# Altium PCB DC CV - PCB.PcbDoc
Units mil, origin at the board's own origin, x right, y up, seen from the top; angles counter-clockwise.
Board outline 1574.8 x 4409.45 mil, 4 copper layers (Top Layer, Signal Layer 1, Signal Layer 2, Bottom Layer), stack 61.811 mil thick; 42 components, 18 nets, 117 pads, 298 vias.
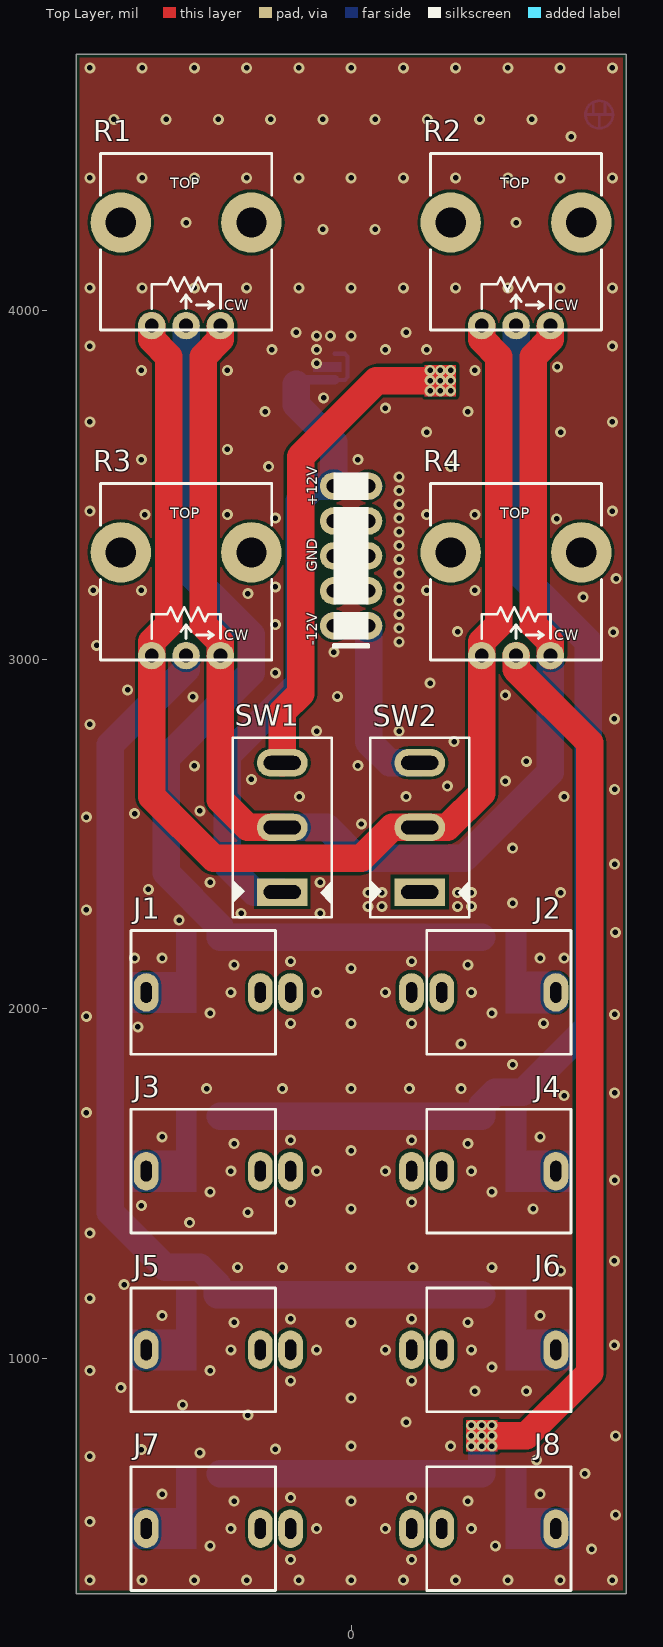
[diagram p0: Top Layer view]
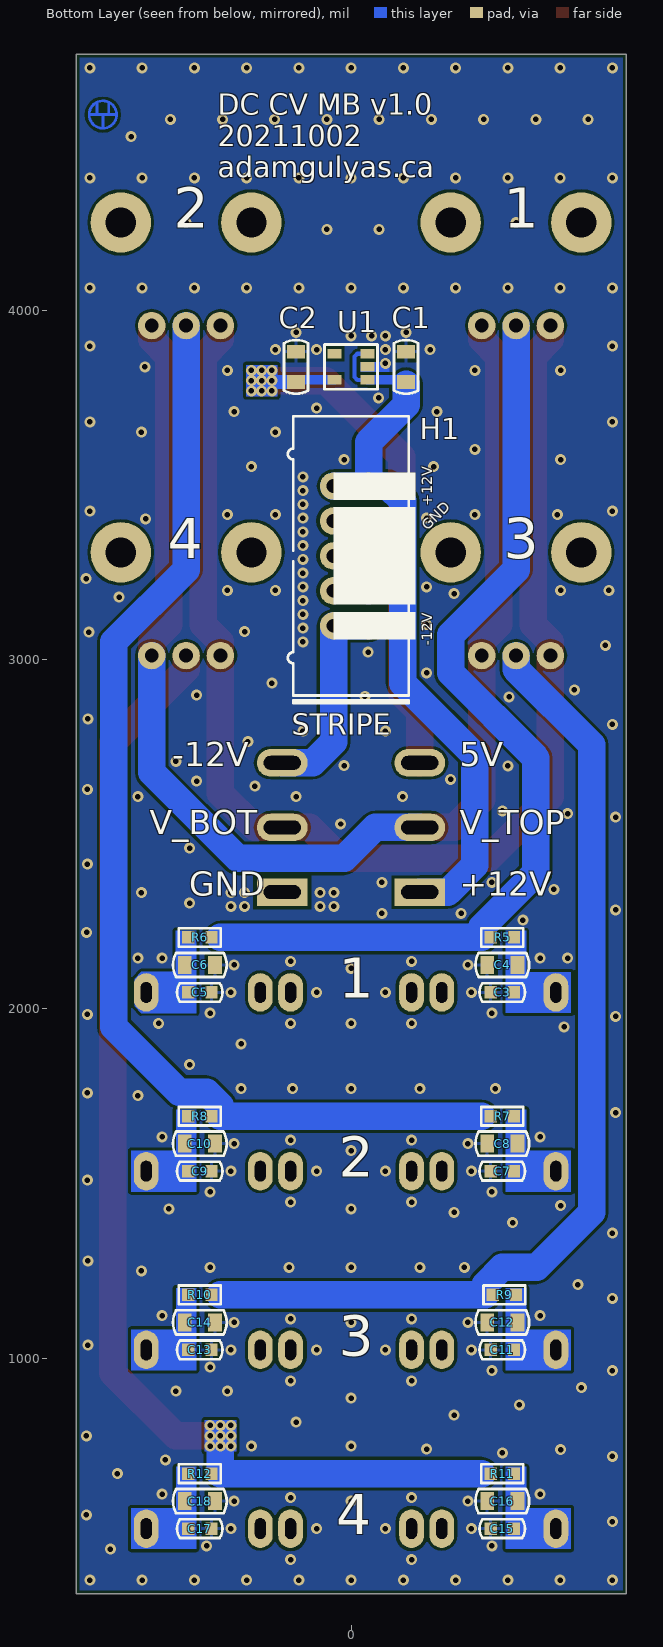
[diagram p1: Bottom Layer view, seen from below]
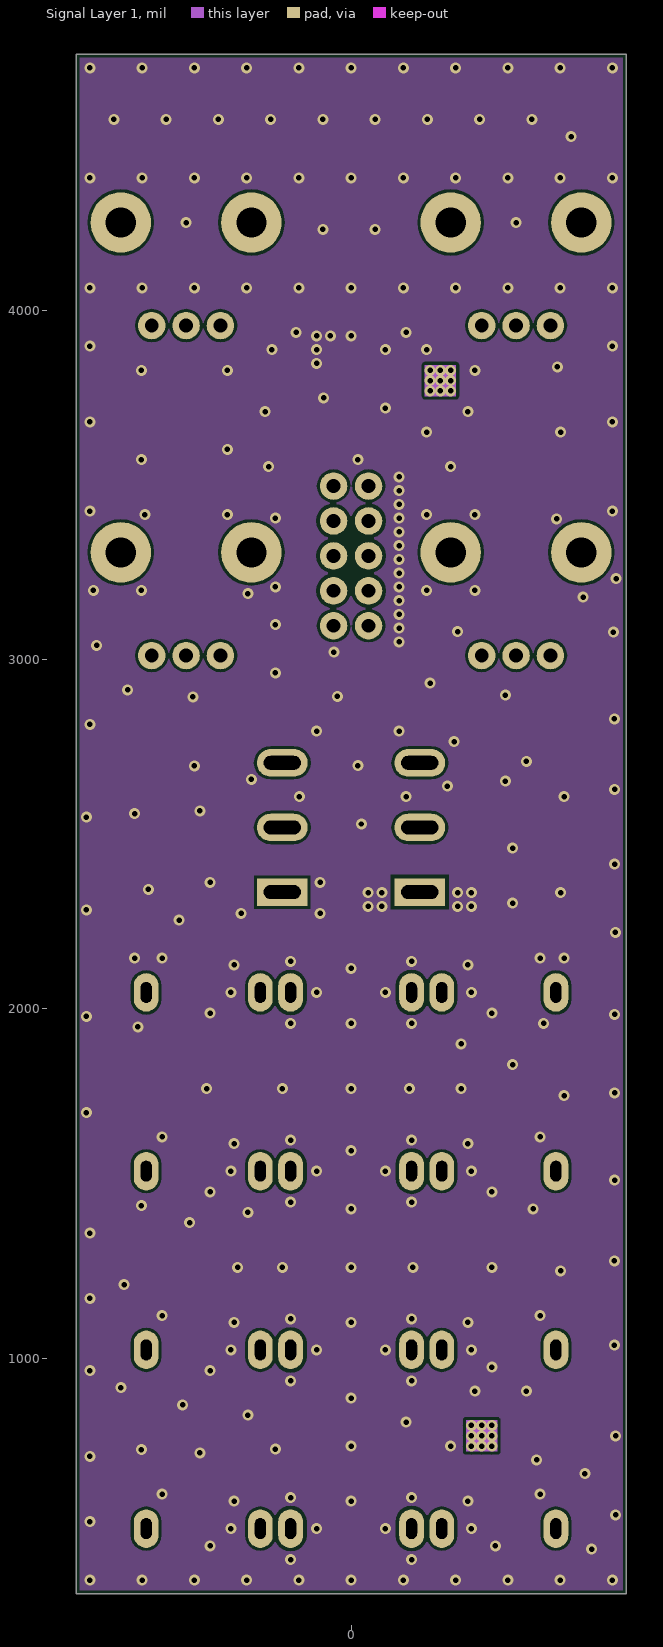
[diagram p2: Signal Layer 1]
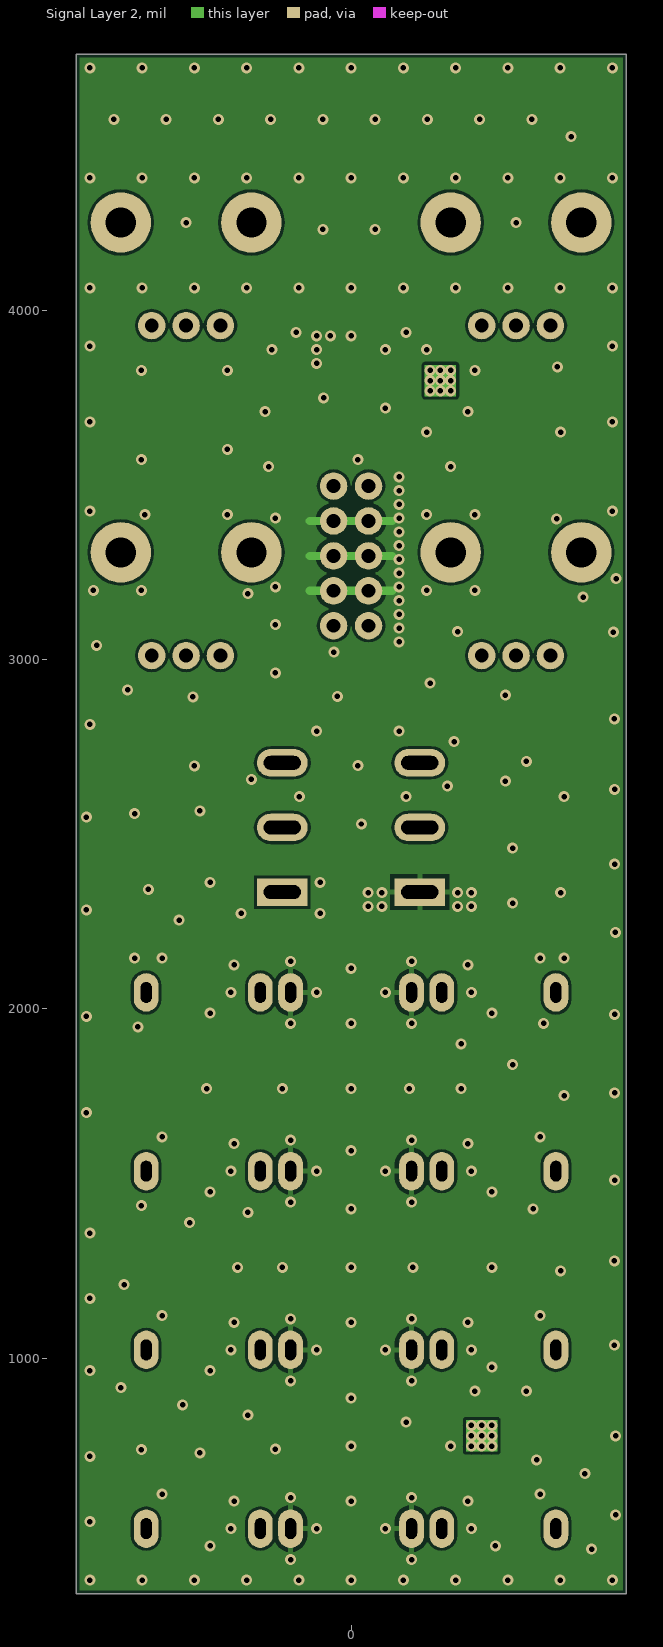
[diagram p3: Signal Layer 2]
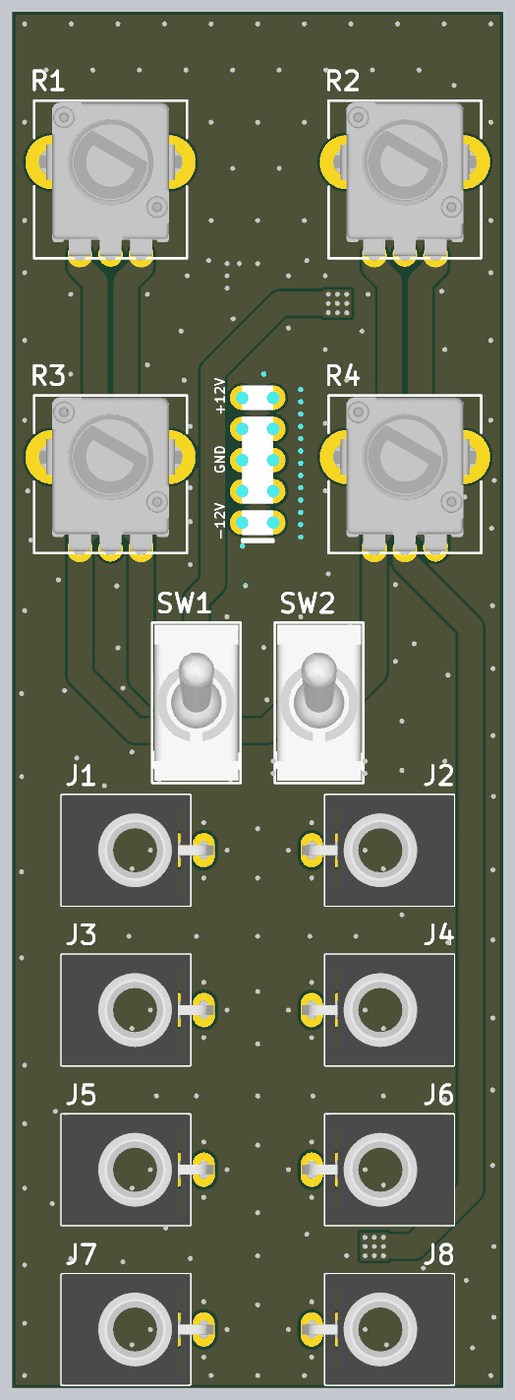
[diagram p4: 3D render of the assembled board from above, using the file's embedded part models]
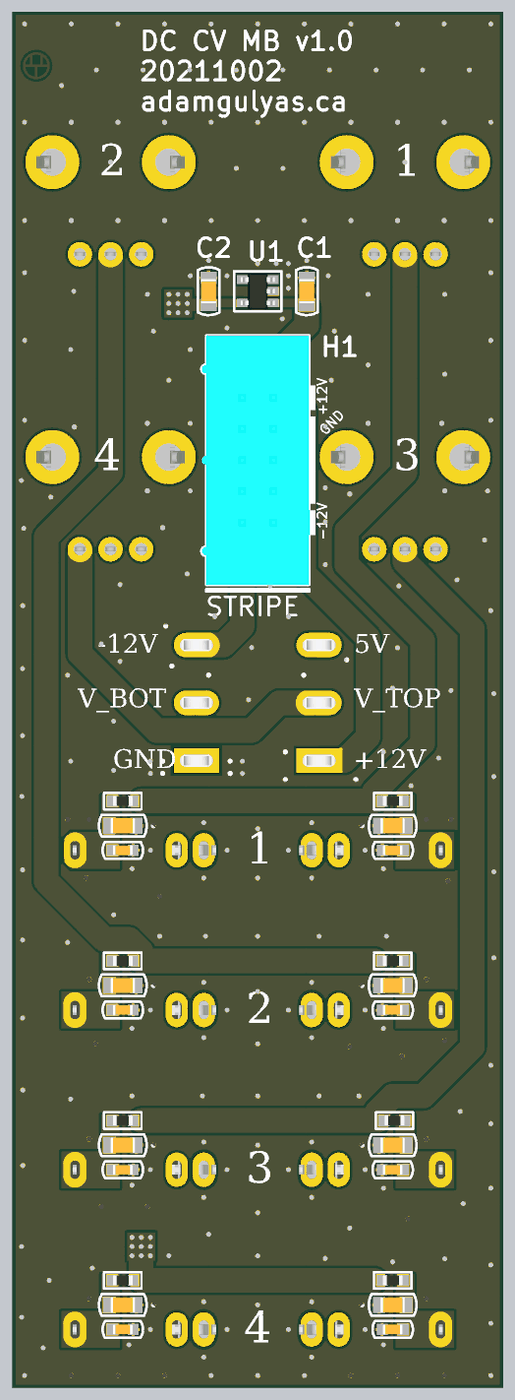
[diagram p5: 3D render of the assembled board from below, using the file's embedded part models]

## Layer stack, top to bottom
Top Solder: solder mask 0.3937, Solder Resist, Dk 3.5
Top Layer: signal copper 1.378
Dielectric 1: prepreg 7.874, FR-4, Dk 4.6
Signal Layer 1: signal copper 0.689
Dielectric 3: core 41.9291, FR-4, Dk 4.6
Signal Layer 2: signal copper 0.689
Dielectric 2: prepreg 7.874, FR-4, Dk 4.6
Bottom Layer: signal copper 1.378
Bottom Solder: solder mask 0.3937, Solder Resist, Dk 3.5

## Board outline
-787.4,324.8 -787.4,4734.25 787.4,4734.25 787.4,324.8

## Design rules (kind name [scope] priority, off if disabled: settings)
Clearance [All] p1: gap=7.87 ignorepadtopadclearanceinfootprint=FALSE
Height [All] p1: minheight=0 maxheight=39370.08 prefheight=500
HoleSize [All] p1: absolutevalues=TRUE maxlimit=3937.01 minlimit=1 maxpercent=80.000 minpercent=20.000
PolygonConnect PolygonConnect_GND_Thermals [OnLayer('Signal Layer 2') vs InNet('GND')] p1: thpad.connectstyle=Relief thpad.reliefconductorwidth=15.75 thpad.reliefentries=4 thpad.polygonreliefangle="90 Angle" thpad.airgapwidth=11.81 smdpad.connectstyle=Relief smdpad.reliefconductorwidth=10 smdpad.reliefentries=4 smdpad.polygonreliefangle="90 Angle" smdpad.airgapwidth=10 via.connectstyle=Direct via.reliefconductorwidth=10 via.reliefentries=4 via.polygonreliefangle="90 Angle" via.airgapwidth=10
PolygonConnect [All] p2: thpad.connectstyle=NoConnect thpad.reliefconductorwidth=10 thpad.reliefentries=4 thpad.polygonreliefangle="90 Angle" thpad.airgapwidth=10 smdpad.connectstyle=Relief smdpad.reliefconductorwidth=10 smdpad.reliefentries=4 smdpad.polygonreliefangle="90 Angle" smdpad.airgapwidth=10 via.connectstyle=Direct via.reliefconductorwidth=10 via.reliefentries=4 via.polygonreliefangle="90 Angle" via.airgapwidth=10
RoutingVias [All] p1: holewidth=15.75 width=31.5 viastyle="Through Hole" minholewidth=3.94 minwidth=0 maxholewidth=3937.01 maxwidth=3937.01
SolderMaskExpansion [All] p1: expansion=4
Width [All] p1: maxlimit=3937.01 minlimit=10 preferedwidth=10 minimp=50.000000 maximp=50.000000 favimp=50.000000
28 further rules are at their usual default settings.

## Components (designator, comment, footprint, x,y, rotation, side; value= is the part's Value field where it differs from the comment)
C1 "10µF" "0805 - C" -157.48,3838.58 r90 bottom
C2 "10µF" "0805 - C" 157.48,3838.58 r90 bottom
C3 "100nF" "0603 - C" -433.07,2047.24 r0 bottom value=0.1µF
C4 "10µF" "0805 - C" -433.07,2125.98 r0 bottom
C5 "100nF" "0603 - C" 433.07,2047.24 r180 bottom value=0.1µF
C6 "10µF" "0805 - C" 433.07,2125.98 r180 bottom
C7 "100nF" "0603 - C" -433.07,1535.43 r0 bottom value=0.1µF
C8 "10µF" "0805 - C" -433.07,1614.17 r0 bottom
C9 "100nF" "0603 - C" 433.07,1535.43 r180 bottom value=0.1µF
C10 "10µF" "0805 - C" 433.07,1614.17 r180 bottom
C11 "100nF" "0603 - C" -433.07,1023.62 r0 bottom value=0.1µF
C12 "10µF" "0805 - C" -433.07,1102.36 r0 bottom
C13 "100nF" "0603 - C" 433.07,1023.62 r180 bottom value=0.1µF
C14 "10µF" "0805 - C" 433.07,1102.36 r180 bottom
C15 "100nF" "0603 - C" -433.07,511.81 r0 bottom value=0.1µF
C16 "10µF" "0805 - C" -433.07,590.55 r0 bottom
C17 "100nF" "0603 - C" 433.07,511.81 r180 bottom value=0.1µF
C18 "10µF" "0805 - C" 433.07,590.55 r180 bottom
H1 "Synth Power Header" "EURORACK POWER - 10 PIN - DC CV" 0,3297.24 r180 bottom
J1 "PJ-3001F" "Jack - TS - PJ-3001F" -393.7,2047.24 r90 top
J2 "PJ-3001F" "Jack - TS - PJ-3001F" 393.7,2047.24 r270 top
J3 "PJ-3001F" "Jack - TS - PJ-3001F" -393.7,1535.43 r90 top
J4 "PJ-3001F" "Jack - TS - PJ-3001F" 393.7,1535.43 r270 top
J5 "PJ-3001F" "Jack - TS - PJ-3001F" -393.7,1023.62 r90 top
J6 "PJ-3001F" "Jack - TS - PJ-3001F" 393.7,1023.62 r270 top
J7 "PJ-3001F" "Jack - TS - PJ-3001F" -393.7,511.81 r90 top
J8 "PJ-3001F" "Jack - TS - PJ-3001F" 393.7,511.81 r270 top
R1 "100kΩ" "Pot - P0915N" -472.44,4251.97 r0 top locked
R2 "100kΩ" "Pot - P0915N" 472.44,4251.97 r0 top locked
R3 "100kΩ" "Pot - P0915N" -472.44,3307.09 r0 top locked
R4 "100kΩ" "Pot - P0915N" 472.44,3307.09 r0 top locked
R5 "470Ω" "0603 - R" -433.07,2204.72 r180 bottom value="470 Ohms"
R6 "470Ω" "0603 - R" 433.07,2204.72 r0 bottom value="470 Ohms"
R7 "470Ω" "0603 - R" -433.07,1692.91 r180 bottom value="470 Ohms"
R8 "470Ω" "0603 - R" 433.07,1692.91 r0 bottom value="470 Ohms"
R9 "470Ω" "0603 - R" -438.98,1181.1 r180 bottom value="470 Ohms"
R10 "470Ω" "0603 - R" 433.07,1181.1 r0 bottom value="470 Ohms"
R11 "470Ω" "0603 - R" -433.07,669.29 r180 bottom value="470 Ohms"
R12 "470Ω" "0603 - R" 433.07,669.29 r0 bottom value="470 Ohms"
SW1 "100SP1T1B1M1QEH" "SW - 100SP1T1B1M1QEH" -196.85,2519.68 r180 top
SW2 "100SP1T1B1M1QEH" "SW - 100SP1T1B1M1QEH" 196.85,2519.68 r180 top
U1 "NCV8711ASN500T1G" "TSOT 23 5" 0,3838.58 r0 bottom

## Footprints (in the part's own frame and the unit in brackets; to place one, negate y for a bottom-side part, rotate by r counter-clockwise, add the part's x,y. Pads: shape width x height; smd on the part's side, far side on the other; paste and mask are expansions set on the pad)
"0603 - C" [mm] "from Yageo R"
  rect 0.9x0.9 smd mask+0.05: 1(-0.85,0) 2(0.85,0)
  silkscreen extent -1.65,-0.67 1.65,0.67, body extent -0.8,-0.4 0.8,0.4, height 0.9
"0603 - R" [mm] "from Yageo"
  rect 0.9x0.9 smd mask+0.05: 1(-0.85,0) 2(0.85,0)
  silkscreen extent -1.53,-0.67 1.53,0.67, body extent -0.8,-0.4 0.8,0.4, height 0.4
"0805 - C" [mm]
  rect 1x1.3 smd mask+0.04: 1(-1.1,0) 2(1.1,0)
  silkscreen extent -1.95,-0.87 1.95,0.87, body extent -1,-0.63 1,0.62, height 0.85
"EURORACK POWER - 10 PIN - DC CV" [mm] "from 30310-6002HB-ND"
  round 2 hole 1 mask+0.05: 1(-1.27,5.08) 1(1.27,5.08) 2(-1.27,-2.54) 2(-1.27,0) 2(-1.27,2.54) 2(1.27,-2.54) 2(1.27,0) 2(1.27,2.54) 3(-1.27,-5.08) 3(1.27,-5.08)
  silkscreen extent -4.6,-10.7 4.69,10.15, body extent -4.56,-10.15 4.25,10.15, height 8.89
"Jack - TS - PJ-3001F" [mm]
  oval 2.8x1.8 hole 0.8 slot 1.5 at 0 deg mask+0.05: 1(0,-5.6) 2(0,-3.4) 3(0,4.9)
  silkscreen extent -4.5,-4.5 4.5,6, body extent -4.5,-6.63 4.5,6, height 14.5
"Pot - P0915N" [mm] "from P0915N-FC15BR100K"
  round 4.4 hole 2.2 mask+0.05: 0(-4.75,0) 0(4.75,0)
  round 2 hole 1 mask+0.05: 1(-2.5,-7.5) 2(0,-7.5) 3(2.5,-7.5)
  silkscreen extent -6.22,-7.83 6.22,5.02, body extent -6.05,-7.65 6.05,4.85, height 25.05
"SW - 100SP1T1B1M1QEH" [mm]
  rect 3.7x2 hole 1 slot 2.7 at 0 deg mask+0.05: 1(0,4.7)
  rrect100% 3.7x2 hole 1 slot 2.7 at 0 deg mask+0.05: 2(0,0) 3(0,-4.7)
  silkscreen extent -3.6,-6.53 3.6,6.53, body extent -3.43,-6.35 3.43,6.35, height 28.96
"TSOT 23 5" [mm]
  rect 1x0.7 smd mask+0.05: 1(-1.2,0.95) 2(-1.2,0) 3(-1.2,-0.95) 4(1.2,-0.95) 5(1.2,0.95)
  silkscreen extent -1.92,-1.63 1.92,1.63, body extent -1.4,-1.45 1.4,1.45, height 0.95

## Part data
C1 C2 C4 C6 C8 C10 C12 C14 C16 C18: library part "C - 0805 - 10uF - 16V", "CAP CER 10UF 16V X5R 0805", Op Temp="-55°C ~ 85°C", Package=0805, Temp Coeff=X5R, Tolerance=±20%, Voltage - Rated=16V, Composition=ceramic, Digi-Key PN=311-3430-1-ND, Height=1.45mm, MFG=Yageo, MFG PN=CC0805MKX5R7BB106, Mounting Type="Surface Mount, MLCC", Price/1 @10=$0.352, Series=CC
C3 C5 C7 C9 C11 C13 C15 C17: library part "C - 0603 - 100nF - 16V", "CAP CER 0.1UF 16V X7R 0603", Op Temp="-55°C ~ 125°C", Package=0603, Temp Coeff=X7R, Tolerance=±10%, Voltage - Rated=16V, Composition=Ceramic, Digi-Key PN=311-1088-1-ND, Height="0.9 mm", MFG=Yageo, MFG PN=CC0603KRX7R7BB104, Mounting Type="Surface Mount, MLCC", Price/1 @10=$0.064, Series=CC
H1: library part "H - Synth Power", "CONN HEADER VERT 10POS 2.54MM", Current Rating (Amps)=1A, Material Flammability Rating="UL94 V-0", Op Temp="-55°C ~ 105°C", Contact Length - Mating=6.00mm, Contact Length - Post=2.79mm, Contact Type="Male Pin", Digi-Key PN=30310-6002HB-ND, Fastening Type=Push-Pull, Features="Keying Slot", Insulation Height=9.30mm, Insulation Material="Polybutylene Terephthalate (PBT), Polyester, Glass Filled", MFG=3M, MFG PN=30310-6002HB, Mounting Type="Through Hole", Number of Positions=10, Number of Rows=2, Pitch - Mating="0.100\"", Price/1 @10=$0.815, Row Spacing - Mating="0.100\"", Series=303, Shrouding="Shrouded - 4 Wall", Termination=Solder
J1 J2 J3 J4 J5 J6 J7 J8: library part "Jack - TS - PJ-3001F", "3.5MM MONO PHONE JACK WITH SWITCH", Rated Current=1A, Rated Voltage=12VDC, ComponentLink1Description=Datasheet, ComponentLink1URL="E:\!Projects\!31. Hackathon Synth\basic-synth\modules\VCA\v1.1.0\Datasheets\PJ-3001F - TS Jack.jpeg", ComponentLink2Description="Online Datasheet", ComponentLink2URL=https://www.taydaelectronics.com/datasheets/files/A-2563.jpeg, ComponentLink3Description="Store Page", ComponentLink3URL=https://www.taydaelectronics.com/pj-3001f-3-5-mm-mono-phone-jack.html, Digi-Key PN=-, MFG="Tayda Electronics", MFG PN=PJ-3001F, Mounting Type="Panel Mounting", Price/1 @10=$0.23, Vendor PN=A-2563
R1 R2 R3 R4: library part "R - pot - 100k", "POT 100K OHM 1/20W PLASTIC LIN", Power (Watts)=50mW, Resistance=100k, Resistive Material="Conductive Plastic", Tolerance=±20%, Actuator Type=Flatted, Adjustment Type="Top Adjustment", Bushing Thread="M7 x 0.75", ComponentLink1Description=Datasheet, ComponentLink1URL="E:\!Projects\!31. Hackathon Synth\basic-synth\modules\VCA\v1.1.0\Datasheets\TT Electronics - P09x Series.pdf", ComponentLink2Description="Online Datasheet", ComponentLink2URL=https://www.mouser.ca/datasheet/2/414/P09x-1545427.pdf, Digi-Key PN=987-1709-ND, MFG="TT Electronics", MFG PN=P0915N-FC15BR100K, Mounting Type="Panel Mount", Number of Gangs=1, Number of Turns=1, Price/1 @10=$1.66, Rotation=300°, Series=P09x, Size - Body="Rectangular - 11.35mm x 9.50mm Face x 7.45mm H", Taper=Linear, Termination Style="PC Pins, Board Locks"
  R1: Purpose=CV1
  R2: Purpose=CV3
  R3 R4: Purpose=CV2
R5 R6 R7 R8 R9 R10 R11 R12: library part "R - 0603 - 470R", "RES SMD 470 OHM 5% 1/10W 0603", Op Temp="-55°C ~ 155°C", Package=0603, Power=0.1W, Temp Coeff=±100ppm/°C, Tolerance=5%, ComponentLink1Description=Datasheet, ComponentLink1URL="E:\!Projects\50. XInC2 Dev 2\git\Datasheets\Yageo - RC series.pdf", ComponentLink2Description="Online Datasheet", ComponentLink2URL=https://www.yageo.com/upload/media/product/productsearch/datasheet/rchip/PYu-RC_Group_51_RoHS_L_11.pdf, Composition="Thick Film", Digi-Key PN=311-470GRCT-ND, Height=0.55mm, MFG=Yageo, MFG PN=RC0603JR-07470RL, Mounting Type="Surface Mount", Price/1 @10=$0.02500, Series=RC
SW1 SW2: library part "SW - SPDT - toggle - 100SP1T1B1M1QEH", "SWITCH TOGGLE SPDT 5A 120V", Current Rating (Amps)="5A (AC/DC)", Op Temp="-30°C ~ 85°C", Voltage Rating - DC="28 V", Bushing Thread=1/4-40, Circuit=SPDT, Digi-Key PN=EG2350-ND, MFG=E-Switch, MFG PN=100SP1T1B1M1QEH, Mounting Type="Panel Mount", Price/1 @10=$3.163, Series=100, Switch Function=On-On, Termination Style="Solder Lug"
U1: library part "Reg - Lin - 5V - NCV8711ASN500T1G", "IC REG LINEAR 5V 100MA 5TSOP", Current - Output=100mA, Current - Quiescent (Iq)="2.5 µA", Op Temp="-40°C ~ 125°C (TJ)", Package="SOT-23-5 Thin, TSOT-23-5", Voltage - Dropout="0.355V @ 100mA", Voltage - Input (Max)=18V, Voltage - Output (Max)=-, Voltage - Output (Min/Fixed)=5V, Digi-Key PN=488-NCV8711ASN500T1GCT-ND, MFG=onsemi, MFG PN=NCV8711ASN500T1G, Mounting Type="Surface Mount", Number of Outputs=1, Output Configuration=Positive, Output Type=Fixed, Price/1 @10=$0.915, Protection Features="Over Current, Over Temperature", Series="Automotive, AEC-Q100"

## Via types
v1: diameter 31.5, hole 15.75, Top Layer to Bottom Layer, tented both sides, 298 vias

## Nets (pads, with @x,y where several pads share a name; then routed paths per layer and width w, separated by ;. In a path a pad name is that pad's centre, name@x,y a point inside that pad or via, vN(x,y) a via of type N, cw(c..) or ccw(c..) an arc to the next point about the centre after c; other vN are vias at no path point)
5V: C2.1 SW1.3 U1.5 | length 1602.3
  Top Layer w78.74: SW1.3 -196.85,2850.39 -144.68,2902.56 -144.68,3581.69 72.83,3799.21 v1(226.38,3799.21)
  Bottom Layer w27.56: U1.5 151.57,3801.18 C2.1 ; v1@226.1,3799.49 226.38,3799.49 255.63,3799.22 v1(255.91,3799.21) v1@251.97,3795.28
  Bottom Layer w39.37: C2.1 v1@251.97,3795.28
  other v1: 226.38,3769.68 255.91,3769.68 285.43,3769.68 285.43,3799.21 226.38,3828.74 255.91,3828.74 285.43,3828.74
+12V: C1.1 H1.1 SW1.1 U1.1 U1.3 | length 2114.8
  Bottom Layer w11.81: U1.1 -17.72,3801.18 -9.84,3809.06 -9.84,3868.11 -17.72,3875.98 U1.3
  Bottom Layer w27.56: C1.1@-151.57,3801.18 U1.1
  Bottom Layer w78.74: SW1.1 -277.56,2334.65 -354.33,2411.42 -354.33,2726.38 -147.64,2933.07 -147.64,3454.72 -105.12,3497.24 H1.1@-50,3497.24 ; C1.1@-157.48,3789.37 -157.48,3730.31 -50,3622.83 H1.1@-50,3497.24 ; H1.1@50,3497.24 H1.1@-50,3497.24
-12V: H1.3 SW2.3 | length 604.1
  Bottom Layer w78.74: H1.3@-50,3097.24 50,3097.24 50,2764.96 110.24,2704.72 SW2.3
CV1: R1.2 R5.1 R6.1 | length 2743
  Bottom Layer w78.74: R1.2 -472.44,3257.87 -285.43,3070.87 -285.43,2962.6 -529.53,2718.5 -529.53,2389.76 -374.02,2234.25 -374.02,2204.72 374.02,2204.72
CV2: R2.2 R7.1 R8.1 | length 3269.9
  Bottom Layer w78.74: -374.02,1692.91 374.02,1692.91 374.02,1722.44 413.39,1761.81 492.13,1761.81 679.13,1948.82 679.13,3051.18 472.44,3257.87 R2.2
CV3: R3.2 R9.1 R10.1 | length 2862.3
  Bottom Layer w78.74: R3.2 -472.44,2972.44 -688.98,2755.91 -688.98,1417.32 -531.5,1259.84 -433.07,1259.84 -383.86,1210.63 -383.86,1181.1 374.02,1181.1
CV4: R4.2 R11.1 R12.1 | length 3380.8
  Top Layer w78.74: v1(374.02,777.56) v1(403.54,777.56) 501.97,777.56 683.07,958.66 683.07,2761.81 472.44,2972.44 R4.2
  Bottom Layer w78.74: -374.02,669.29 374.02,669.29 v1(374.02,748.03) v1(374.02,777.56)
  other v1: 344.49,748.03 403.54,748.03 344.49,777.56 344.49,807.09 374.02,807.09 403.54,807.09
GND: C1.2 C2.2 C3.2 C4.2 C5.2 C6.2 C7.2 C8.2 C9.2 C10.2 C11.2 C12.2 C13.2 C14.2 C15.2 C16.2 C17.2 C18.2 H1.2 J1.1 J2.1 J3.1 J4.1 J5.1 J6.1 J7.1 J8.1 SW2.1 U1.2 | length 708.7
  Signal Layer 2 w23.62: -118.11,3197.24 -50,3197.24 50,3197.24 118.11,3197.24 ; -118.11,3297.24 -50,3297.24 50,3297.24 118.11,3297.24 ; -118.11,3397.24 -50,3397.24 50,3397.24 118.11,3397.24
  other v1: -748.03,364.17 -598.43,364.17 -448.82,364.17 -299.21,364.17 -149.61,364.17 0,364.17 149.61,364.17 299.21,364.17 448.82,364.17 598.43,364.17 748.03,364.17 -173.23,423.23 173.23,423.23 688.98,452.76 -403.54,462.6 413.39,462.6 -344.49,511.81 -98.43,511.81 98.43,511.81 344.49,511.81 -748.03,531.5 757.87,551.18 -334.65,590.55 0,590.55 334.65,590.55 -173.23,600.39 173.23,600.39 -541.34,610.24 541.34,610.24 669.29,669.29 531.5,708.66 -748.03,718.5 -433.07,728.35 -600.39,738.19 -216.54,739.17 0,748.03 285.43,748.03 757.87,777.56 157.48,816.93 -295.28,836.61 -482.28,866.14 0,885.83 354.33,905.51 501.97,905.51 -659.45,915.35 -173.23,935.04 173.23,935.04 -748.03,964.57 -403.54,964.57 403.54,974.41 -344.49,1023.62 -98.43,1023.62 98.43,1023.62 344.49,1023.62 753.94,1037.4 -334.65,1102.36 0,1102.36 334.65,1102.36 -173.23,1112.2 173.23,1112.2 -541.34,1122.05 541.34,1122.05 -748.03,1171.26 -649.61,1210.63 600.39,1250 -324.8,1259.84 -196.85,1259.84 0,1259.84 177.17,1259.84 403.54,1259.84 753.94,1278.54 -748.03,1358.27 -462.6,1387.8 -295.28,1417.32 0,1427.17 521.65,1427.17 -600.39,1437.01 -173.23,1446.85 173.23,1446.85 -403.54,1476.38 403.54,1476.38 754.92,1509.84 -344.49,1535.43 -98.43,1535.43 98.43,1535.43 344.49,1535.43 0,1594.49 -334.65,1614.17 334.65,1614.17 -173.23,1624.02 173.23,1624.02 -541.34,1633.86 541.34,1633.86 -757.87,1702.76 610.24,1751.97 754.92,1759.84 -413.39,1771.65 -196.85,1771.65 0,1771.65 167.32,1771.65 314.96,1771.65 462.6,1840.55 314.96,1899.61 -610.24,1948.82 -173.23,1958.66 0,1958.66 173.23,1958.66 551.18,1958.66 -757.87,1978.35 754.92,1984.25 -403.54,1988.19 403.54,1988.19 -344.49,2047.24 -98.43,2047.24 98.43,2047.24 344.49,2047.24 0,2116.14 -334.65,2125.98 334.65,2125.98 -173.23,2135.83 173.23,2135.83 -620.08,2145.67 -541.34,2145.67 541.34,2145.67 610.24,2145.67 756.89,2219.49 -492.13,2253.94 -314.96,2273.62 -88.58,2273.62 -757.87,2283.46 49.21,2293.31 88.58,2293.31 305.12,2293.31 344.49,2293.31 462.6,2303.15 49.21,2332.68 88.58,2332.68 305.12,2332.68 344.49,2332.68 600.39,2332.68 -580.71,2342.52 -403.54,2362.2 -88.58,2362.2 754.92,2414.37 462.6,2460.63 29.53,2529.53 -757.87,2549.21 -620.08,2559.06 -433.07,2566.93 -147.64,2608.27 157.48,2608.27 610.24,2608.27 754.92,2628.94 275.59,2637.8 441.93,2652.56 -285.43,2657.48 -448.82,2695.87 19.68,2696.85 501.97,2708.66 295.28,2765.75 -98.43,2795.28 137.8,2795.28 -748.03,2814.96 753.94,2830.71 -452.76,2893.7 -39.37,2894.83 441.93,2898.62 -639.76,2913.39 226.38,2933.07 -216.54,2962.6 -49.21,3021.65 -728.35,3041.34 137.8,3051.18 750.98,3078.74 305.12,3080.71 137.8,3090.55 -216.54,3100.39 137.8,3129.92 137.8,3169.29 664.37,3179.13 -295.28,3188.98 -738.19,3198.82 -600.39,3198.82 216.54,3198.82 354.33,3198.82 -216.54,3208.66 137.8,3208.66 758.86,3232.28 137.8,3248.03 137.8,3287.4 137.8,3326.77 137.8,3366.14 588.58,3403.54 -216.54,3405.51 137.8,3405.51 -590.55,3415.35 -354.33,3415.35 216.54,3415.35 354.33,3415.35 -748.03,3425.2 748.03,3425.2 137.8,3444.88 137.8,3484.25 137.8,3523.62 -236.22,3553.15 285.43,3553.15 -600.39,3572.83 19.68,3572.83 -354.33,3602.36 216.54,3651.57 600.39,3651.57 -748.03,3681.1 748.03,3681.1 -246.06,3710.63 334.65,3710.63 98.43,3720.47 -78.74,3750 -600.39,3828.74 -354.33,3828.74 354.33,3828.74 590.55,3838.58 -98.43,3848.43 -226.38,3887.8 -98.43,3887.8 98.43,3887.8 216.54,3887.8 -748.03,3897.64 748.03,3897.64 -98.43,3927.17 -59.06,3927.17 0,3927.17 -157.48,3937.01 157.48,3937.01 -748.03,4064.96 -598.43,4064.96 -448.82,4064.96 -299.21,4064.96 -149.61,4064.96 0,4064.96 149.61,4064.96 299.21,4064.96 448.82,4064.96 598.43,4064.96 748.03,4064.96 -80.71,4232.28 68.9,4232.28 -472.44,4251.97 472.44,4251.97 -748.03,4379.92 -598.43,4379.92 -448.82,4379.92 -299.21,4379.92 -149.61,4379.92 0,4379.92 149.61,4379.92 299.21,4379.92 448.82,4379.92 598.43,4379.92 748.03,4379.92 629.92,4498.03 -679.13,4547.24 -529.53,4547.24 -379.92,4547.24 -230.32,4547.24 -80.71,4547.24 68.9,4547.24 218.5,4547.24 368.11,4547.24 517.72,4547.24 -748.03,4694.88 -598.43,4694.88 -448.82,4694.88 -299.21,4694.88 -149.61,4694.88 0,4694.88 149.61,4694.88 299.21,4694.88 448.82,4694.88 598.43,4694.88 748.03,4694.88
NetC3_1: C3.1 C4.1 J1.3 R5.2
NetC5_1: C5.1 C6.1 J2.3 R6.2
NetC7_1: C7.1 C8.1 J3.3 R7.2
NetC9_1: C9.1 C10.1 J4.3 R8.2
NetC11_1: C11.1 C12.1 J5.3 R9.2
NetC13_1: C13.1 C14.1 J6.3 R10.2
NetC15_1: C15.1 C16.1 J7.3 R11.2
NetC17_1: C17.1 C18.1 J8.3 R12.2
V_BOTTOM: R1.1 R2.1 R3.1 R4.1 SW2.2 | length 3864.3
  Top Layer w78.74: R1.1 -570.87,3917.32 -521.65,3868.11 -521.65,3100.39 -570.87,3051.18 R3.1 -570.87,2608.27 -393.7,2431.1 29.53,2431.1 118.11,2519.68 SW2.2 275.59,2519.68 374.02,2618.11 R4.1 374.02,3051.18 423.23,3100.39 423.23,3868.11 374.02,3917.32 R2.1
V_TOP: R1.3 R2.3 R3.3 R4.3 SW1.2 | length 3835.4
  Top Layer w78.74: R1.3 -374.02,3917.32 -423.23,3868.11 -423.23,3100.39 -374.02,3051.18 R3.3 -374.02,2598.43 -295.28,2519.68 SW1.2 ; R4.3 570.87,3051.18 521.65,3100.39 521.65,3868.11 570.87,3917.32 R2.3
  Bottom Layer w78.74: SW1.2 -68.9,2519.68 19.68,2431.1 324.8,2431.1 570.87,2677.17 R4.3
pads on no net: J1.2 J2.2 J3.2 J4.2 J5.2 J6.2 J7.2 J8.2 R1.0 R2.0 R3.0 R4.0 U1.4
copper on no net: | length 862.8
  Bottom Layer w7.87: 693.9,4560.97 693.9,4594.43 693.9,4561.95 ; 727.36,4560.97 727.36,4594.43 727.36,4561.95 ; 750,4560.97 ccw(c710.63,4560.97) 750,4560.97 ; 750,4560.97 ccw(c710.63,4560.97) 750,4560.97 ; 750,4560.97 671.26,4560.97 750,4560.97 ; 710.63,4521.6 710.63,4560.97 710.63,4521.6

## Polygon pours and split planes (outlines as drawn)
GND on Signal Layer 1 "GND_L02_P004" (solid, pour order 4): -777.56,4724.41 777.56,4724.41 777.56,334.65 -777.56,334.65
GND on Signal Layer 2 "GND_L03_P006" (solid, pour order 6): -777.56,4724.41 777.56,4724.41 777.56,334.65 -777.56,334.65
GND on Top Layer "GND_L01_P000" (solid, pour order 0): -777.56,4724.41 777.56,4724.41 777.56,334.65 -777.56,334.65
GND on Bottom Layer "GND_L04_P002" (solid, pour order 2): -777.56,4724.41 777.56,4724.41 777.56,334.65 -777.56,334.65

## Other copper
Top Layer:
  rectangle net CV4: 328.74,732.28 419.29,822.83
  rectangle net 5V: 210.63,3753.94 301.18,3844.49
Signal Layer 1:
  rectangle net CV4: 328.74,732.28 419.29,822.83
  rectangle net 5V: 210.63,3753.94 301.18,3844.49
Signal Layer 2:
  rectangle net CV4: 328.74,732.28 419.29,822.83
  rectangle net 5V: 210.63,3753.94 301.18,3844.49
Bottom Layer:
  rectangle net NetC3_1: -501.97,1988.19 -442.91,2224.41
  rectangle net NetC3_1: -629.92,1988.19 -442.91,2106.3
  rectangle net NetC7_1: -629.92,1476.38 -442.91,1594.49
  rectangle net NetC7_1: -501.97,1476.38 -442.91,1712.6
  rectangle net NetC11_1: -629.92,964.57 -442.91,1082.68
  rectangle net NetC11_1: -501.97,964.57 -442.91,1200.79
  rectangle net NetC15_1: -629.92,452.76 -442.91,570.87
  rectangle net NetC15_1: -501.97,452.76 -442.91,688.98
  region net NetC17_1: 629.92,570.87 442.91,570.87 442.91,452.76 629.92,452.76
  region net NetC17_1: 501.97,688.98 442.91,688.98 442.91,452.76 501.97,452.76
  region net NetC13_1: 629.92,1082.68 442.91,1082.68 442.91,964.57 629.92,964.57
  region net NetC13_1: 501.97,1200.79 442.91,1200.79 442.91,964.57 501.97,964.57
  region net NetC9_1: 629.92,1594.49 442.91,1594.49 442.91,1476.38 629.92,1476.38
  region net NetC9_1: 501.97,1712.6 442.91,1712.6 442.91,1476.38 501.97,1476.38
  rectangle net CV4: 328.74,732.28 419.29,822.83
  rectangle net 5V: 210.63,3753.94 301.18,3844.49
  rectangle net GND: -109.58,3823.26 -27.56,3852.2
  region net NetC5_1: 442.91,2224.41 501.97,2224.41 501.97,2106.3 600.39,2106.3 620.08,2086.61 620.08,2007.87 600.39,1988.19 442.91,1988.19

## Silkscreen, mask and mechanical layers (free items; w line width, h text height)
Bottom Overlay:
  text "DC CV MB v1.0 / 20211002 / adamgulyas.ca" at 382.04,4380.91 h60
  text "1" at -437.19,4198.13 h196.85
  text "2" at 507.79,4197.58 h196.85
  text "3" at -437.19,3251.97 h196.85
  text "4" at 524.55,3251.97 h196.85
  text "5V" at -310.97,2672.1 h118.11
  text "-12V" at 511.9,2672.1 h118.11
  text "V_TOP" at -310.97,2476.95 h118.11
  text "V_BOT" at 576.06,2476.95 h118.11
  text "+12V" at -310.97,2301.58 h118.11
  text "GND" at 462.83,2301.58 h118.11
  text "1" at 35.26,1993.4 h196.85
  text "2" at 35.35,1481.05 h196.85
  text "3" at 35.26,968.51 h196.85
  text "4" at 42.27,456.7 h196.85
Mechanical 1:
  the board outline again, w10
Mechanical 2:
  drawing of 295 lines, arcs and shapes, not listed
  text "Layer" at 1663.1,1753.94 h60
  text "Name" at 2073.01,1753.94 h60
  text "Material" at 3012.76,1753.94 h60
  text "Thickness" at 3872.52,1753.94 h60
  text "Constant" at 4522.36,1753.94 h60
  text "Board Layer Stack" at 5092.22,1753.94 h60
  text "1" at 1663.1,1633.94 h60
  text "Top Overlay" at 2073.01,1633.94 h60
  text "2" at 1663.1,1513.94 h60
  text "Top Solder" at 2073.01,1513.94 h60
  text "Solder Resist" at 3012.76,1513.94 h60
  text "0.010mm" at 3872.52,1513.94 h60
  text "3.5" at 4522.36,1513.94 h60
  text "3" at 1663.1,1393.94 h60
  text "Top Layer" at 2073.01,1393.94 h60
  text "Copper" at 3012.76,1393.94 h60
  text "0.035mm" at 3872.52,1393.94 h60
  text "4" at 1663.1,1273.94 h60
  text "Dielectric 1" at 2073.01,1273.94 h60
  text "FR-4" at 3012.76,1273.94 h60
  text "0.200mm" at 3872.52,1273.94 h60
  text "4.6" at 4522.36,1273.94 h60
  text "5" at 1663.1,1153.94 h60
  text "Signal Layer 1" at 2073.01,1153.94 h60
  text "Copper" at 3012.76,1153.94 h60
  text "0.018mm" at 3872.52,1153.94 h60
  text "6" at 1663.1,1033.94 h60
  text "Dielectric 3" at 2073.01,1033.94 h60
  text "FR-4" at 3012.76,1033.94 h60
  text "1.065mm" at 3872.52,1033.94 h60
  text "4.6" at 4522.36,1033.94 h60
  text "7" at 1663.1,913.94 h60
  text "Signal Layer 2" at 2073.01,913.94 h60
  text "Copper" at 3012.76,913.94 h60
  text "0.018mm" at 3872.52,913.94 h60
  text "8" at 1663.1,793.94 h60
  text "Dielectric 2" at 2073.01,793.94 h60
  text "FR-4" at 3012.76,793.94 h60
  text "0.200mm" at 3872.52,793.94 h60
  text "4.6" at 4522.36,793.94 h60
  text "9" at 1663.1,673.94 h60
  text "Bottom Layer" at 2073.01,673.94 h60
  text "Copper" at 3012.76,673.94 h60
  text "0.035mm" at 3872.52,673.94 h60
  text "10" at 1663.1,553.94 h60
  text "Bottom Solder" at 2073.01,553.94 h60
  text "Solder Resist" at 3012.76,553.94 h60
  text "0.010mm" at 3872.52,553.94 h60
  text "3.5" at 4522.36,553.94 h60
  text "11" at 1663.1,433.94 h60
  text "Bottom Overlay" at 2073.01,433.94 h60
Mechanical 3:
  circle w10: c-472.44,4251.97 r393.7
  circle w10: c472.44,4251.97 r393.7
  circle w10: c-472.44,3307.09 r393.7
  circle w10: c472.44,3307.09 r393.7
Drill Drawing:
  circle w10: c-667.09,-735.76 r33.33
  lines w10: -700.42,-1052.42 -683.76,-1052.42 -667.09,-1069.09 -650.42,-1052.42 -633.76,-1052.42 -650.42,-1035.76 -633.76,-1019.09 -650.42,-1019.09 -667.09,-1002.42 -683.76,-1019.09 -700.42,-1019.09 -683.76,-1035.76 -700.42,-1052.42 ; -700.42,-919.09 -633.76,-919.09 -633.76,-852.42 -700.42,-852.42 -700.42,-919.09 ; -700.42,-552.42 -633.76,-552.42 -667.09,-619.09 -700.42,-552.42 ; -700.42,-469.09 -667.09,-452.42 -633.76,-469.09 -650.42,-435.76 -633.76,-402.42 -667.09,-419.09 -700.42,-402.42 -683.76,-435.76 -700.42,-469.09
  lines w15: -760.22,-1114.09 7269.55,-1114.09 ; -760.22,-364.09 7269.55,-364.09 ; -209.34,-1264.09 -209.34,-214.09 ; 390.5,-1264.09 390.5,-214.09 ; 1480.18,-1264.09 1480.18,-214.09 ; 1986.06,-1264.09 1986.06,-214.09 ; 2719.86,-1264.09 2719.86,-214.09 ; 4219.41,-1264.09 4219.41,-214.09 ; 4809.26,-1264.09 4809.26,-214.09 ; 5555.06,-1264.09 5555.06,-214.09 ; -760.22,-1264.09 7269.55,-1264.09 7269.55,-214.09 -760.22,-214.09 -760.22,-1264.09
  text "Symbol" at -670.22,-319.09 h72
  text "Count" at -164.34,-319.09 h72
  text "Hole Size" at 435.5,-319.09 h72
  text "Plated" at 1525.18,-319.09 h72
  text "Hole Type" at 2031.06,-319.09 h72
  text "Drill Layer Pair" at 2764.86,-319.09 h72
  text "Via/Pad" at 4264.41,-319.09 h72
  text "Pad Shape" at 4854.26,-319.09 h72
  text "Template" at 5600.06,-319.09 h72
  text "298" at -164.34,-469.09 h60
  text "0.400mm (15.75mil)" at 435.5,-469.09 h60
  text "PTH" at 1525.18,-469.09 h60
  text "Round" at 2031.06,-469.09 h60
  text "Top Layer - Bottom Layer" at 2764.86,-469.09 h60
  text "Via" at 4264.41,-469.09 h60
  text "Rounded" at 4854.26,-469.09 h60
  text "v80h40m0mx0" at 5600.06,-469.09 h60
  text "24" at -164.34,-619.09 h60
  text "0.800mm (31.50mil)" at 435.5,-619.09 h60
  text "PTH" at 1525.18,-619.09 h60
  text "Slot" at 2031.06,-619.09 h60
  text "Top Layer - Bottom Layer" at 2764.86,-619.09 h60
  text "Pad" at 4264.41,-619.09 h60
  text "Rounded" at 4854.26,-619.09 h60
  text "r280_180h80_150r100m285_185" at 5600.06,-619.09 h60
  text "22" at -164.34,-769.09 h60
  text "1.000mm (39.37mil)" at 435.5,-769.09 h60
  text "PTH" at 1525.18,-769.09 h60
  text "Round" at 2031.06,-769.09 h60
  text "Top Layer - Bottom Layer" at 2764.86,-769.09 h60
  text "Pad" at 4264.41,-769.09 h60
  text "Rounded" at 4854.26,-769.09 h60
  text "c200h100m205" at 5600.06,-769.09 h60
  text "6" at -164.34,-919.09 h60
  text "1.000mm (39.37mil)" at 435.5,-919.09 h60
  text "PTH" at 1525.18,-919.09 h60
  text "Slot" at 2031.06,-919.09 h60
  text "Top Layer - Bottom Layer" at 2764.86,-919.09 h60
  text "Pad" at 4264.41,-919.09 h60
  text "(Mixed)" at 4854.26,-919.09 h60
  text "(Mixed)" at 5600.06,-919.09 h60
  text "8" at -164.34,-1069.09 h60
  text "2.200mm (86.61mil)" at 435.5,-1069.09 h60
  text "PTH" at 1525.18,-1069.09 h60
  text "Round" at 2031.06,-1069.09 h60
  text "Top Layer - Bottom Layer" at 2764.86,-1069.09 h60
  text "Pad" at 4264.41,-1069.09 h60
  text "Rounded" at 4854.26,-1069.09 h60
  text "c440h220m445" at 5600.06,-1069.09 h60
  text "358 Total" at -164.34,-1219.09 h60
  text "Slot definitions :" at -670.22,-1364.06 h60
  text "Routed Path Length" at 362.47,-1364.06 h60
  text "= Calculated from tool start centre position to tool end centre position." at 1465.14,-1364.06 h60
  text "Hole Length" at 362.47,-1464.04 h60
  text "= Routed Path Length + Tool Size = Slot length as defined in the PCB layout" at 1055.27,-1464.04 h60

## Dimensions
-787.4,4734.25 to -787.4,324.8 on Mechanical 2
-787.4,4734.25 to 787.4,4734.25 on Mechanical 2

## Text inside footprints (layer, text, board x,y; h text height)
H1: Top Overlay "-12V" at -96.46,3039.76 h30 r90; Top Overlay "GND" at -96.46,3252.26 h30 r90; Top Overlay "+12V" at -96.46,3439.76 h30 r90; Bottom Overlay "STRIPE" at 170.22,2785.43 h59.06; Bottom Overlay "-12V" at -232.12,3039.76 h30 r270; Bottom Overlay "+12V" at -232.12,3439.76 h30 r270; Bottom Overlay "GND" at -219.09,3367.13 h30 r315
R1: Top Overlay "CW" at -363.65,4000.98 h30; Top Overlay "TOP" at -517.43,4350.39 h30
R2: Top Overlay "TOP" at 427.45,4350.39 h30; Top Overlay "CW" at 581.23,4000.98 h30
R3: Top Overlay "CW" at -363.65,3056.1 h30; Top Overlay "TOP" at -517.43,3405.51 h30
R4: Top Overlay "CW" at 581.23,3056.1 h30; Top Overlay "TOP" at 427.45,3405.51 h30